# Altium PCB Module_RS485_UART.PcbDoc
Units mm, origin at the board's own origin, x right, y up, seen from the top; angles counter-clockwise.
Board outline 70 x 25 mm, 2 copper layers (Top Layer, Bottom Layer); 16 components, 16 nets, 60 pads, 11 vias.
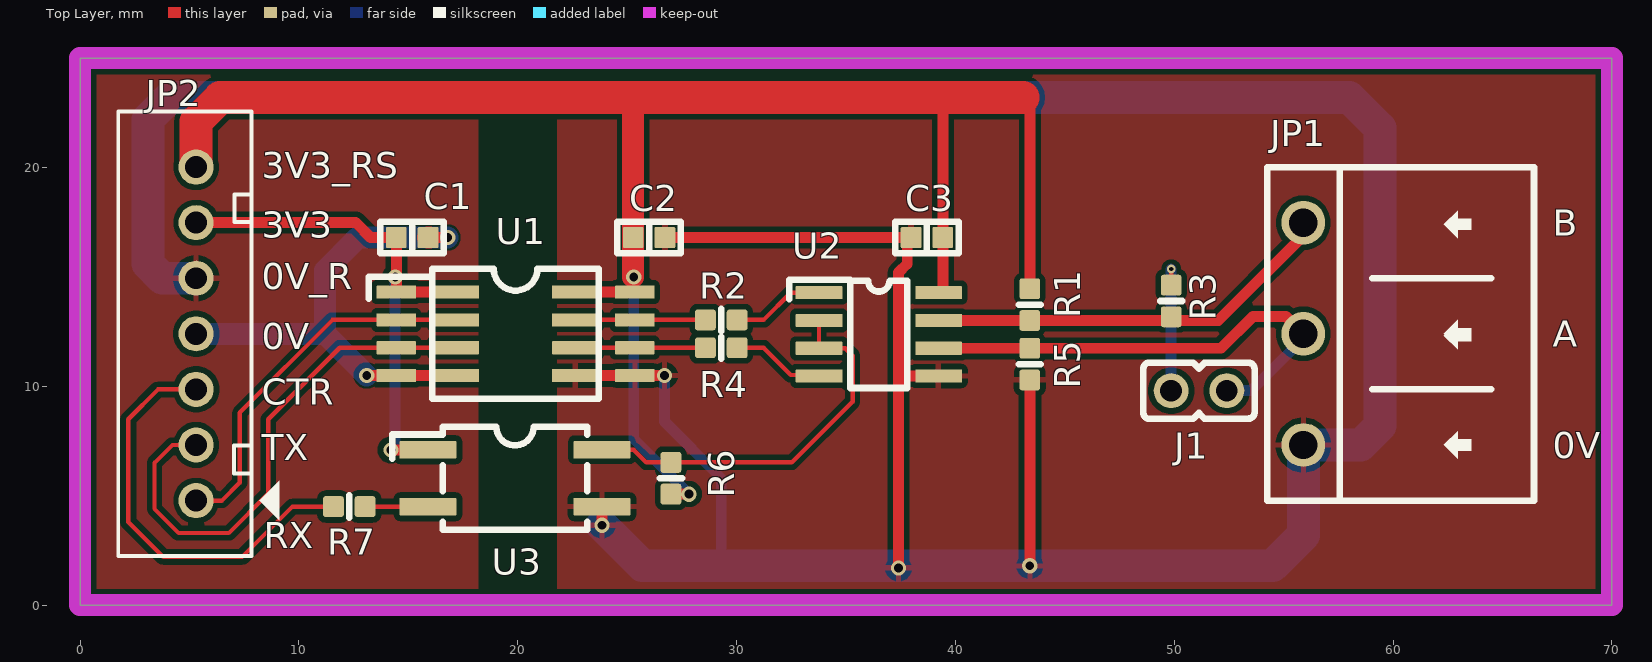
[diagram p0: Top Layer view]
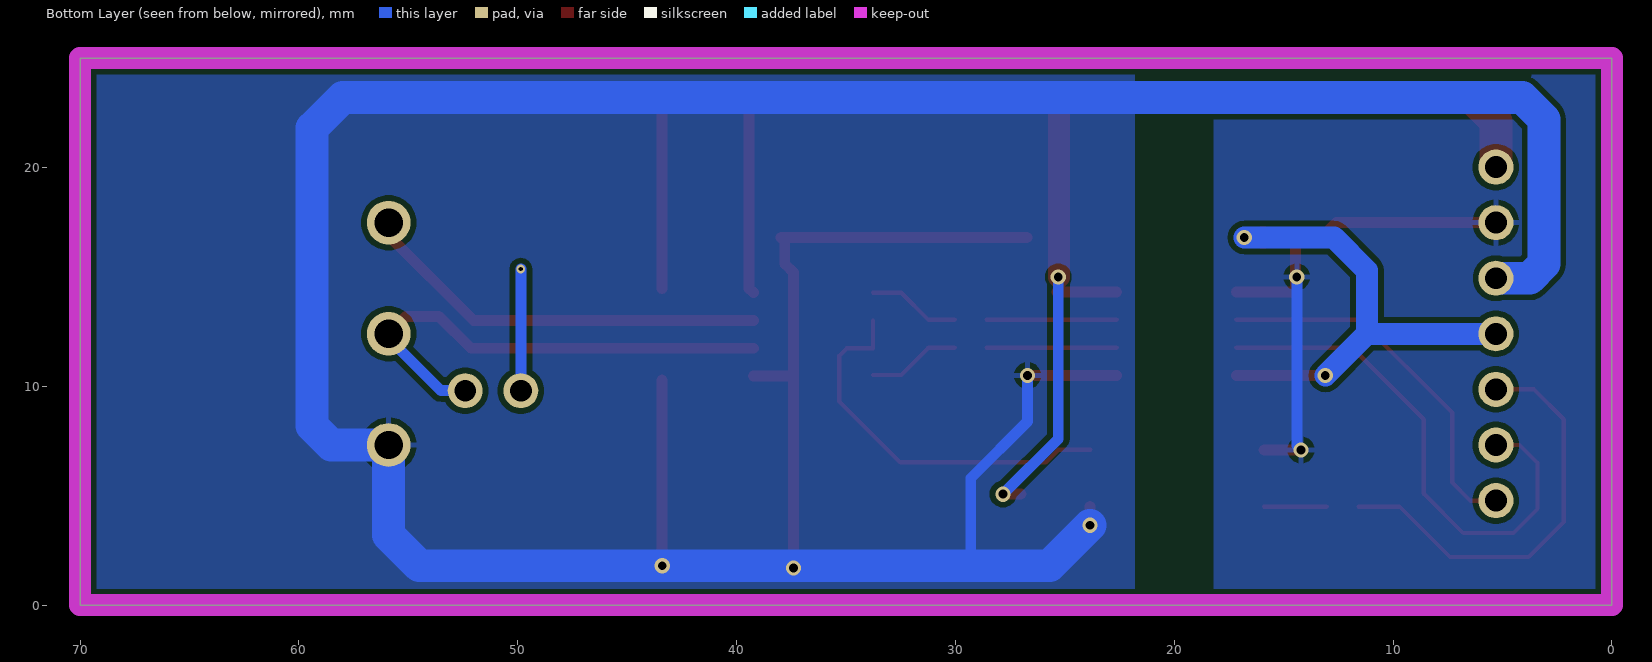
[diagram p1: Bottom Layer view, seen from below]
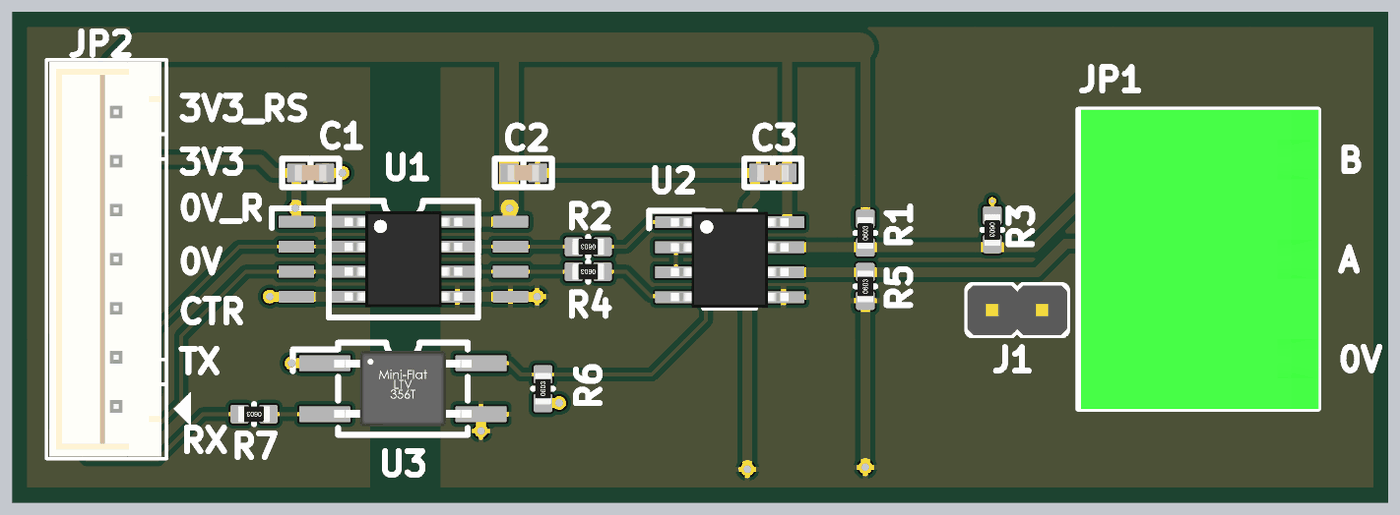
[diagram p2: 3D render of the assembled board from above, using the file's embedded part models]

## Layer stack, top to bottom
Top Solder: solder mask 0.0102, Solder Resist, Dk 3.5
Top Layer: signal copper 0.0356
Dielectric 1: dielectric 0.32, FR-4, Dk 4.8
Bottom Layer: signal copper 0.0356
Bottom Solder: solder mask 0.0102, Solder Resist, Dk 3.5

## Board outline
0,0 70,0 70,25 0,25

## Design rules (kind name [scope] priority, off if disabled: settings)
Clearance [All] p1: gap=0.254 ignorepadtopadclearanceinfootprint=FALSE except(0: Arc-Hole Track-Hole SMDPad-Hole THPad-Hole Via-Hole Fill-Hole Poly-Hole Region-Hole Text-Hole)
PolygonConnect [All] p1: connectstyle=Relief reliefconductorwidth=0.254 reliefentries=4 polygonreliefangle="90 Angle" airgapwidth=0.254
RoutingVias RoutingVias_power [InNetClass('Power')] p1: holewidth=0.4 width=0.7 viastyle="Through Hole" minholewidth=0.4 minwidth=0.7 maxholewidth=0.4 maxwidth=0.7
RoutingVias RoutingVias_signal [All] p2: holewidth=0.2 width=0.4 viastyle="Through Hole" minholewidth=0.2 minwidth=0.4 maxholewidth=0.2 maxwidth=0.4
SolderMaskExpansion [All] p1: expansion=0.102 istentingtop=FALSE
Width Width_power [InNetClass('Power')] p1: maxlimit=2 minlimit=0.2 preferedwidth=0.5
Width Width_signal [All] p2: maxlimit=0.2 minlimit=0.2 preferedwidth=0.2
30 further rules are at their usual default settings.

## Classes and differential pairs
net class Power: 3V3 3V3_MCU GND_MCU GND_P NetJ1_1 NetJ1_2 NetJP1_1

## Components (designator, comment, footprint, x,y, rotation, side; value= is the part's Value field where it differs from the comment)
C1 "1uF/10V" "Cap Ceramic 0603 SMD" 15.175,16.8 r0 top
C2 "1uF/10V" "Cap Ceramic 0603 SMD" 26,16.8 r0 top
C3 "1uF/10V" "Cap Ceramic 0603 SMD" 38.7,16.8 r180 top
J1 "Jumper" Header_2 51.13,9.8 r0 top
JP1 "JP3" 2EDGR-5.08-03P 55.9,12.4 r270 top value="Connector 3"
JP2 "JP7" CON7 5.3,12.4 r90 top value="Connector 7"
R1 "2K2" "Res 0603 SMD_v2" 43.4,13.735 r90 top
R2 "120" "Res 0603 SMD_v2" 29.3,13.035 r180 top
R3 "120" "Res 0603 SMD_v2" 49.86,13.9 r270 top
R4 "120" "Res 0603 SMD_v2" 29.3,11.765 r180 top
R5 "2K2" "Res 0603 SMD_v2" 43.4,11.015 r90 top
R6 "10K" "Res 0603 SMD_v2" 27,5.8 r90 top
R7 "330" "Res 0603 SMD_v2" 12.3,4.505 r180 top
U1 "ISO7721DR SOIC 8" "ISO7721D SOIC-8 10.9mm" 19.9,12.4 r270 top
U2 "SP3485 SOIC8" "SP3485 SOIC-8 3.9mm" 36.5,12.375 r270 top
U3 "PC817-SOP4" TPC817-4SOP 19.872,5.8 r0 top

## Footprints (in the part's own frame and the unit in brackets; to place one, negate y for a bottom-side part, rotate by r counter-clockwise, add the part's x,y. Pads: shape width x height; smd on the part's side, far side on the other; paste and mask are expansions set on the pad)
2EDGR-5.08-03P [mm] "Terminal Block 3 Chân 5.08 Chân Cong 3EDG-5.08-3P-L"
  round 2 hole 1.3 mask+0.1: 1(-5.08,0) 2(0,0) 3(5.08,0)
  silkscreen extent -7.62,-1.66 7.62,10.54, body extent -7.62,-1.52 7.62,10.58, height 8.1
"Cap Ceramic 0603 SMD" [mm] "Reflow Soldering"
  rrect10% 0.95x0.95 smd mask+0.1: 1(-0.725,0) 2(0.725,0)
  silkscreen extent -1.45,-0.72 1.45,0.73, body extent -0.8,-0.4 0.8,0.4, height 0.85
CON7 [mm] "CON7"
  round 1.6 hole 1 mask+0.1: 1(-7.62,0) 2(-5.08,0) 3(-2.54,0) 4(0,0) 5(2.54,0) 6(5.08,0) 7(7.62,0)
  silkscreen extent -10.16,-3.8 10.16,3.56, body extent -10.05,-2.29 10.05,3.41, height 7
Header_2 [mm] "Connector DIP, 2Pin_2.54mm"
  round 1.6 hole 1 mask+0.1: 1(-1.27,0) 2(1.27,0)
  silkscreen extent -2.54,-1.28 2.54,1.28, body extent -2.54,-1.27 2.54,1.27, height 10.1
"ISO7721D SOIC-8 10.9mm" [mm] "SOIC-8 10.9mm"
  rrect10% 0.6x1.8 smd mask+0.07: 1(-1.905,-5.45) 2(-0.635,-5.45) 3(0.635,-5.45) 4(1.905,-5.45) 5(1.905,5.45) 6(0.635,5.45) 7(-0.635,5.45) 8(-1.905,5.45)
  rrect10% 0.6x2.135 smd mask+0.1: 1(-1.905,-2.732) 2(-0.635,-2.732) 3(0.635,-2.732) 4(1.905,-2.732) 5(1.905,2.733) 6(0.635,2.733) 7(-0.635,2.733) 8(-1.905,2.733)
  silkscreen extent -2.98,-6.7 2.98,3.81, body extent -2.45,-3 2.45,3, height 1.75
"Res 0603 SMD_v2" [mm]
  rrect25% 0.95x0.95 smd mask+0.1: 1(-0.725,0) 2(0.725,0)
  silkscreen extent 0,-0.51 0,0.51, body extent -0.8,-0.4 0.8,0.4, height 0.48
"SP3485 SOIC-8 3.9mm" [mm] "8-Pin SOIC 3.9mm Width"
  rrect10% 0.6x2.135 smd mask+0.1: 1(-1.905,-2.732) 2(-0.635,-2.732) 3(0.635,-2.732) 4(1.905,-2.732) 5(1.905,2.733) 6(0.635,2.733) 7(-0.635,2.733) 8(-1.905,2.733)
  silkscreen extent -2.5,-4.1 2.45,1.3, body extent -2.45,-3 2.45,3, height 1.75
TPC817-4SOP [mm] "OPTOISO 5KV TRANS 4SOP"
  rrect10% 2.6x0.8 smd: 1(-3.975,1.295) 2(-3.975,-1.295) 3(3.975,-1.295) 4(3.975,1.295)
  silkscreen extent -5.6,-2.35 3.3,2.35, body extent -3.5,-1.92 3.5,1.93, height 2

## Part data
C1 C2 C3: library part "Cap Ceramic SMD", Buy Link=https://www.thegioiic.com/products/tu-1uf-50v-0805
J1: "Jumper Wire", LatestRevisionDate=17-Jul-2002, LatestRevisionNote="Re-released for DXP Platform.", PackageDescription="Radial Cap, Thru-Hole; 2 Leads; 0.2 in Pin Spacing", PackageReference=RAD-0.2, Published=24-Mar-1999, Publisher="Altium Limited"
JP1: library part Con3, "Connector 3"
JP2: library part Con7, "Connector 7"
R1 R2 R3 R4 R5 R6 R7: library part 249K/R0805/1%_2, "RES SMD 249K OHM 1% 1/10W 0805", Manufacturer=Yageo, Manufacturer Part Number=RC0603FR-07249KL, Operating Temperature="-55°C ~ 155°C", Package / Case="0603 (1608 Metric)", Power (Watts)="0.1W, 1/10W", Supplier Device Package=0603, Temperature Coefficient=±100ppm/°C, Tolerance=±1%, Category=Resistors, ComponentLink1Description=http://www.yageo.com/documents/recent/PYu-RC_Group_51_RoHS_L_8.pdf, ComponentLink1URL=http://www.yageo.com/documents/recent/PYu-RC_Group_51_RoHS_L_8.pdf, Composition="Thick Film", Failure Rate=-, Features="Moisture Resistant", Height - Seated (Max)="0.022\" (0.55mm)", Packaging="Cut Tape (CT)", Part Status=Active, Pricing 1="1=0.1, 10=0.015, 100=0.006, 1000=0.00268, 2500=0.00233 (USD)", RoHS="RoHS Compliant", Size / Dimension="0.063\" L x 0.032\" W (1.60mm x 0.80mm)", Stock 1=370515, Supplier 1=Digi-Key
U1: "ISO772x High-Speed, Robust EMC, Reinforced Dual-Channel Digital Isolators"
U3: library part PC817, "Optoisolator Transistor Output 5000Vrms 1 Channel 4-SOP", BuyVN=https://banlinhkien.vn/goods-1134-pc817-el817-sop4-opto.html, Digikey=TPC817S1BRAGCT-ND

## Via types
v1: diameter 0.7, hole 0.4, Top Layer to Bottom Layer, 10 vias
v2: diameter 0.4, hole 0.2, Top Layer to Bottom Layer, 1 vias

## Nets (pads, with @x,y where several pads share a name; then routed paths per layer and width w, separated by ;. In a path a pad name is that pad's centre, name@x,y a point inside that pad or via, vN(x,y) a via of type N, cw(c..) or ccw(c..) an arc to the next point about the centre after c; other vN are vias at no path point)
3V3: C2.1 C3.1 JP2.7 R1.2 R6.1 U1.8 U2.8 | length 81.7
  Top Layer w0.5: U1.8@22.633,14.305 25.35,14.305 25.275,14.38 v1@25.275,15 ; 25.2,23.2 25.275,23.125 ; R6.1 v1(27.825,5.075) ; U2.8 39.425,14.472 C3.1 39.425,23.175 39.4,23.2 ; 43.1,23.2 43.4,22.9 R1.2
  Top Layer w1: v1@25.275,15 C2.1 25.275,23.125
  Top Layer w1.5: JP2.7 5.3,22.1 6.4,23.2 25.2,23.2 39.4,23.2 43.1,23.2
  Bottom Layer w0.5: v1(25.3,15) 25.3,7.6 v1(27.825,5.075)
3V3_MCU: C1.1 JP2.6 U1.1 U3.1 | length 27.9
  Top Layer w0.5: JP2.6 12.595,17.48 13.275,16.8 C1.1 ; v1(14.205,7.095) U3.1 ; U1.1@17.167,14.305 14.45,14.305 C1.1 ; C1.1 14.45,15 C1.1
  Bottom Layer w0.5: v1(14.205,7.095) 14.4,7.29 v1(14.4,15)
CONTROL: R6.2 U2.2 U2.3 U3.4 | length 17.9
  Top Layer w0.2: U3.4 25.305,7.095 25.875,6.525 R6.2 32.525,6.525 35.3,9.3 35.3,11.4 34.96,11.74 U2.3 U2.2
GND_MCU: C1.2 JP2.4 U1.4 | length 22.7
  Top Layer w0.5: v1(13.095,10.495) 14.45,10.495 U1.4@17.168,10.495 ; C1.2@15.975,16.8 v1(16.8,16.8)
  Top Layer w1: C1.2 C1.2@15.975,16.8
  Bottom Layer w1: JP2.4 11.19,12.4 ; v1(13.095,10.495) 11.19,12.4 ; v1(16.8,16.8) 12.7,16.8 11.19,15.29 11.19,12.4
GND_P: C2.2 C3.2 JP1.3 JP2.5 R5.1 U1.5 U2.5 U3.3 | length 173
  Top Layer w0.5: U1.5@22.633,10.495 25.35,10.495 v1(26.705,10.495) ; v1(23.847,3.653) U3.3 ; C2.2 C3.2 37.8,16.625 37.8,15.6 37.4,15.2 37.4,10.4 ; v1(37.4,1.7) 37.4,10.4 ; U2.5 37.47,10.47 37.4,10.4 ; v1(43.4,1.8) R5.1
  Bottom Layer w0.5: v1(26.705,10.495) 26.705,8.395 29.3,5.8 29.3,1.8
  Bottom Layer w1.5: JP2.5 3.76,14.94 3.1,15.6 3.1,22.2 4.1,23.2 58,23.2 59.4,21.8 59.4,8.2 58.52,7.32 JP1.3 55.9,3.2 54.5,1.8 29.3,1.8 25.7,1.8 v1(23.847,3.653)
MCU_CTRL: JP2.3 R7.2 | length 19.4
  Top Layer w0.2: JP2.3 3.56,9.86 2.2,8.5 2.2,3.8 3.8,2.2 7.4,2.2 9.705,4.505 R7.2
MCU_RX: JP2.1 U1.2 | length 17.2
  Top Layer w0.2: JP2.1 6.48,4.78 7.3,5.6 7.3,8.8 11.535,13.035 14.45,13.035 U1.2@17.168,13.035
MCU_TX: JP2.2 U1.3 | length 24.1
  Top Layer w0.2: JP2.2 4.22,7.32 3.4,6.5 3.4,4.4 4.5,3.3 6.8,3.3 8.6,5.1 8.6,8.5 11.865,11.765 14.45,11.765 U1.3@17.168,11.765
NetJ1_1: J1.1 R3.1 | length 6.3
  Top Layer w0.2: R3.1 v2(49.86,15.36)
  Bottom Layer w0.5: J1.1 v2(49.86,15.36)
NetJ1_2: J1.2 JP1.2 R5.2 U2.6 | length 22.3
  Top Layer w0.5: U2.6 R5.2 52.14,11.74 53.6,13.2 55.1,13.2 JP1.2
  Bottom Layer w0.5: J1.2 53.5,9.8 55.9,12.2 JP1.2
NetJP1_1: JP1.1 R1.1 R3.2 U2.7 | length 18.9
  Top Layer w0.5: U2.7 R1.1 52.01,13.01 55.9,16.9 JP1.1
NetR2_1: R2.1 U2.1 | length 4.3
  Top Layer w0.2: R2.1 31.235,13.035 32.48,14.28 U2.1
NetR2_2: R2.2 U1.7 | length 12.4
  Top Layer w0.2: U1.7@22.633,13.035 R2.2 ; R2.2 25.35,13.035 R2.2
NetR4_1: R4.1 U2.4 | length 4.3
  Top Layer w0.2: R4.1 31.235,11.765 32.48,10.52 U2.4@33.768,10.52
NetR4_2: R4.2 U1.6 | length 5.9
  Top Layer w0.2: U1.6@22.633,11.765 25.35,11.765 R4.2
NetR7_1: R7.1 U3.2 | length 2.9
  Top Layer w0.2: R7.1 U3.2

## Polygon pours and split planes (outlines as drawn)
GND_P on Top Layer "GND_P_L01_P001" (solid, pour order 1): 0,25.1 0,-0.2 18.2,-0.2 18.2,25 17.6,25
GND_P on Top Layer "GND_P_L01_P000" (solid, pour order 0): 70.2,25.1 70.2,0 21.8,0 21.8,25 24.8,25
3V3_MCU on Bottom Layer "3V3_MCU_L02_P003" (solid, pour order 3): 0,25.1 0,-0.2 18.2,-0.2 18.2,25
GND_P on Bottom Layer "GND_P_L02_P002" (solid, pour order 2): 70,25 70,0 21.8,0 21.8,25

## Keep-outs
Keep-Out Layer:
  the board outline again, w1

## Silkscreen, mask and mechanical layers (free items; w line width, h text height)
Top Overlay:
  text "3V3_RS" at 8.3,19.52 h1.2
  text "B" at 67.3,16.88 h1.2
  text "3V3" at 8.3,16.78 h1.2
  text "0V_R" at 8.3,14.44 h1.2
  text "A" at 67.3,11.8 h1.2
  text "0V" at 8.3,11.7 h1.2
  text "CTR" at 8.3,9.16 h1.2
  text "0V" at 67.3,6.72 h1.2
  text "TX" at 8.3,6.62 h1.2
  text "RX" at 8.4,2.6 h1.2

## Dimensions
0,25 to 0,0 on Mechanical 10
0,25 to 70,25 on Mechanical 10

## Text inside footprints (layer, text, board x,y; h text height)
J1: Mechanical 1 "1" at 49.606,9.546 h1.2; Mechanical 1 "2" at 52.146,9.546 h1.2; Mechanical 1 "HD?" at 51.18,9.85 h0.8
JP1: Top Hinh chieu bang "1" at 55.416,17.616 h1 r270; Top Hinh chieu bang "3" at 55.416,7.638 h1 r270
U1: Top Hinh chieu bang "4" at 16.3,10.8 h1 r270; Top Hinh chieu bang "1" at 16.3,14.5 h1 r270; Top Hinh chieu bang "5" at 22.5,10.8 h1 r270; Top Hinh chieu bang "8" at 22.5,14.7 h1 r270; Top Hinh chieu bang "4" at 18.2,10.8 h1 r270; Top Hinh chieu bang "5" at 20.612,10.78 h1 r270; Top Hinh chieu bang "8" at 20.612,14.64 h1 r270
U2: Top Hinh chieu bang "8" at 37.212,14.615 h1 r270; Top Hinh chieu bang "5" at 37.212,10.755 h1 r270; Top Hinh chieu bang "4" at 34.8,10.775 h1 r270
U3: Top Hinh chieu bang "C" at 22.272,6.7 h0.8; Top Hinh chieu bang "A" at 16.872,5.9 h0.8; Top Hinh chieu bang "K" at 16.872,4.106 h0.8; Top Hinh chieu bang "E" at 22.272,4.1 h0.8